# EAGLE board PCB Resistor Board (EAGLE 9.6.2)
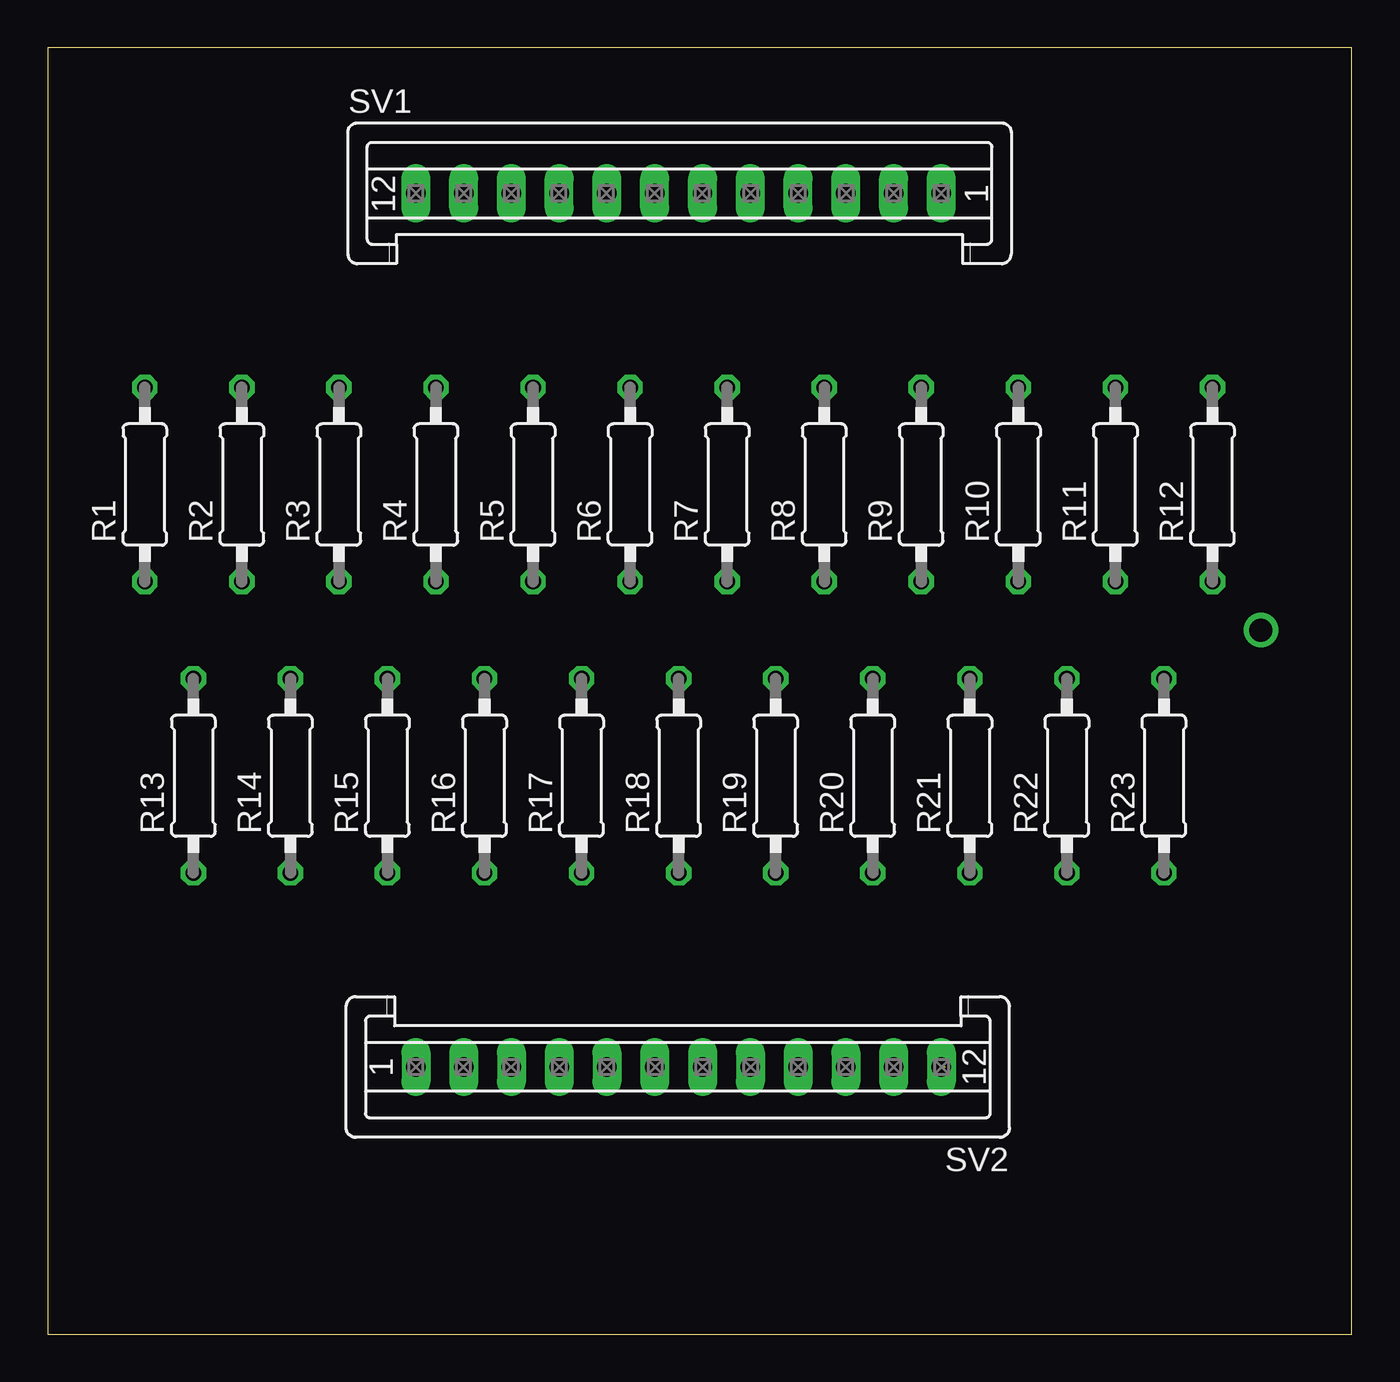
[diagram p0: board, top side]
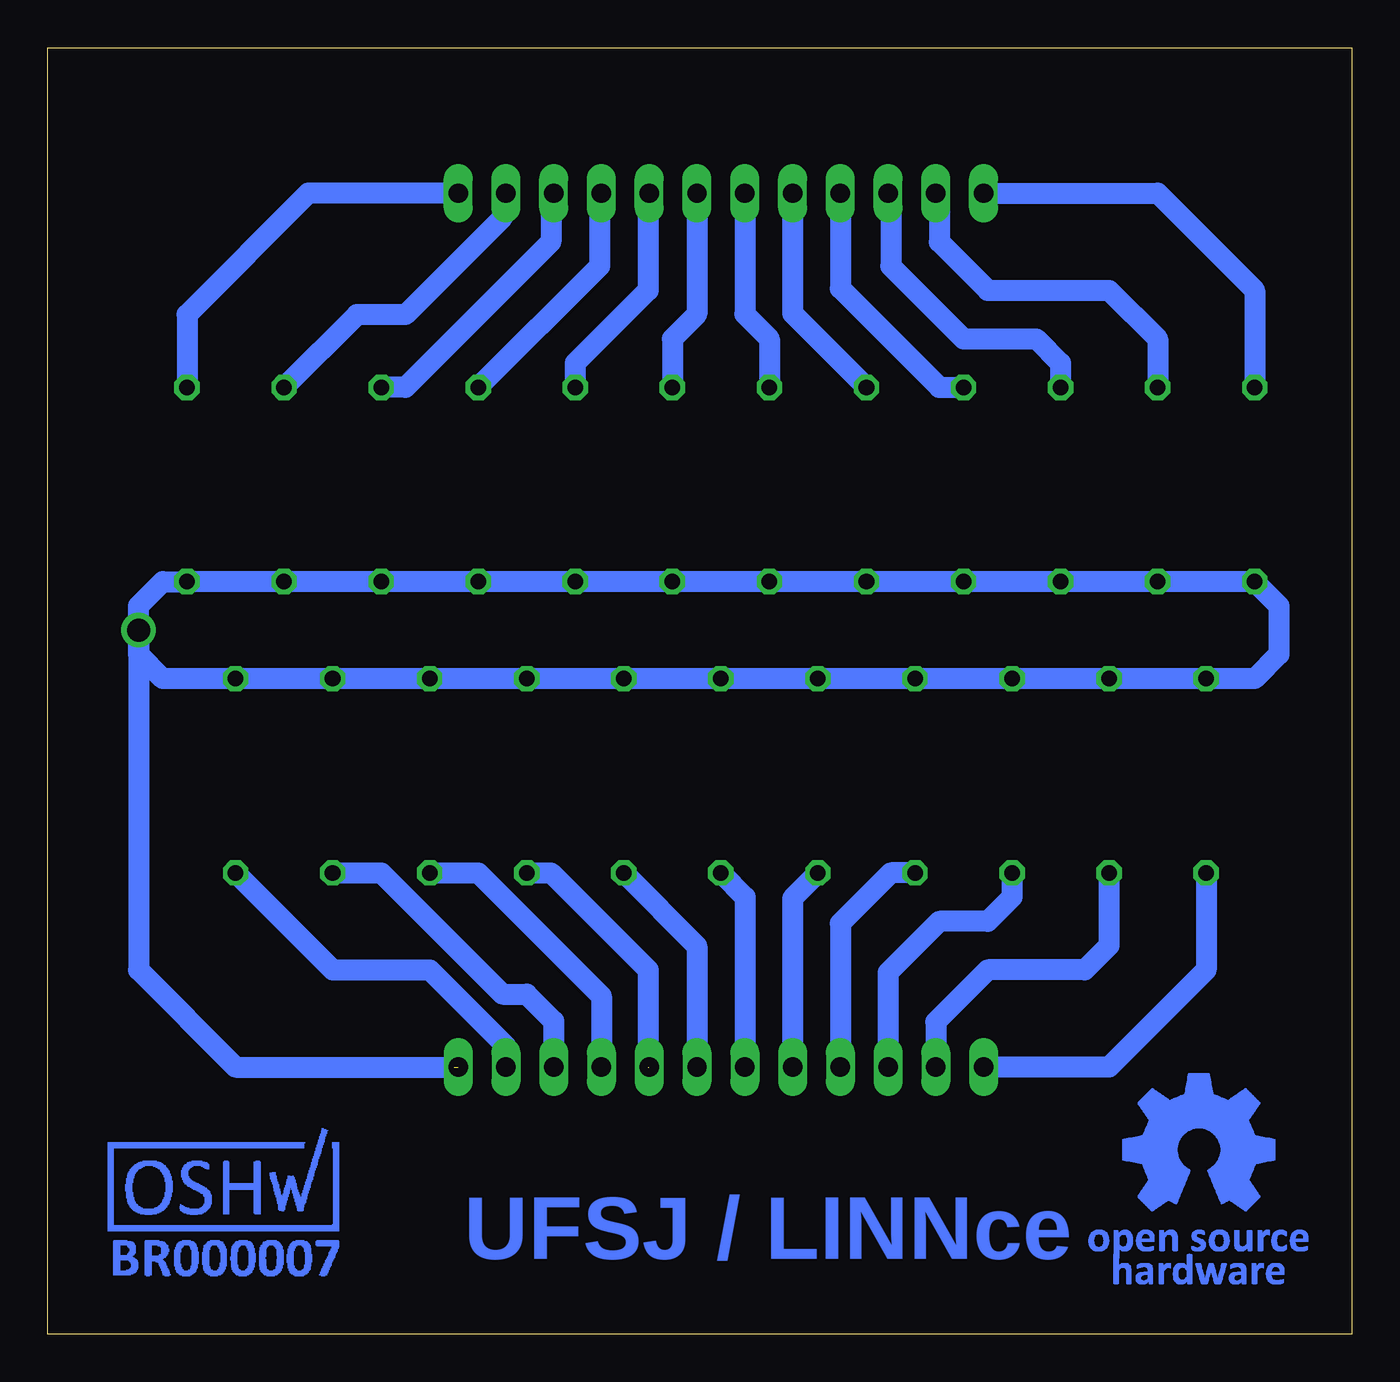
[diagram p1: board, bottom side, seen from below]

Size 68.25 x 67.3 mm. Coordinates in mm from the lower left corner, seen from the top.
Outline: 0,0 68.25,0 68.25,67.3 0,67.3 0,0
Copper layers (1*16): Top 0.035mm / dielectric 1.5mm / Bottom 0.035mm
Design rules "default": minimum track width 6mil, minimum drill 0.35mm, track to track 6mil, track to pad 6mil, pad to pad 6mil, via to via 6mil, smd to smd 6mil, copper to edge 40mil, drill to drill 6mil, minimum pad ring 10mil, minimum via ring 8mil, stop-mask expansion 4mil, vias tented up to drill 0mil, thermal gap 10mil

## Footprints (pad centres in the part's own frame; a part is rotated, then mirrored left to right if it is on the bottom)
0207/10 = drill 0.813 octagon: 1 -5.08,0; 2 5.08,0
S12P = drill 1.016 long: 1 13.75,0; 2 11.25,0; 3 8.75,0; 4 6.25,0; 5 3.75,0; 6 1.25,0; 7 -1.25,0; 8 -3.75,0; 9 -6.25,0; 10 -8.75,0; 11 -11.25,0; 12 -13.75,0

## Placement (x,y rotation side)
R1  [0207/10]  5.08,44.45 90 top
R2  [0207/10]  10.16,44.45 90 top
R3  [0207/10]  15.24,44.45 90 top
R4  [0207/10]  20.32,44.45 90 top
R5  [0207/10]  25.4,44.45 90 top
R6  [0207/10]  30.48,44.45 90 top
R7  [0207/10]  35.56,44.45 90 top
R8  [0207/10]  40.64,44.45 90 top
R9  [0207/10]  45.72,44.45 90 top
R10  [0207/10]  50.8,44.45 90 top
R11  [0207/10]  55.88,44.45 90 top
R12  [0207/10]  60.96,44.45 90 top
R13  [0207/10]  7.62,29.21 90 top
R14  [0207/10]  12.7,29.21 90 top
R15  [0207/10]  17.78,29.21 90 top
R16  [0207/10]  22.86,29.21 90 top
R17  [0207/10]  27.94,29.21 90 top
R18  [0207/10]  33.02,29.21 90 top
R19  [0207/10]  38.1,29.21 90 top
R20  [0207/10]  43.18,29.21 90 top
R21  [0207/10]  48.26,29.21 90 top
R22  [0207/10]  53.34,29.21 90 top
R23  [0207/10]  58.42,29.21 90 top
SV1  [S12P]  33.02,59.69 0 top
SV2  [S12P]  33.02,13.97 180 top

## Library data of the parts
R1-R23 = rcl; SPICEPREFIX: R
SV1 SV2 = con-amp-mt; OC_FARNELL: unknown; OC_NEWARK: unknown

## Nets
N$1: R13.1 SV2.1
N$2: R14.1 SV2.2
N$3: R15.1 SV2.3
N$4: R16.1 SV2.4
N$5: R17.1 SV2.5
N$6: R18.1 SV2.6
N$7: R19.1 SV2.7
N$8: R20.1 SV2.8
N$9: R21.1 SV2.9
N$10: R22.1 SV2.10
N$11: R23.1 SV2.11
N$12: R1.2 SV1.12
N$13: R1.1 R2.1 R3.1 R4.1 R5.1 R6.1 R7.1 R8.1 R9.1 R10.1 R11.1 R12.1 R13.2 R14.2 R15.2 R16.2 R17.2 R18.2 R19.2 R20.2 R21.2 R22.2 R23.2 SV2.12
N$14: R2.2 SV1.11
N$15: R3.2 SV1.10
N$16: R4.2 SV1.9
N$17: R5.2 SV1.8
N$18: R6.2 SV1.7
N$19: R7.2 SV1.6
N$20: R8.2 SV1.5
N$21: R9.2 SV1.4
N$22: R10.2 SV1.3
N$23: R11.2 SV1.2
N$24: R12.2 SV1.1

## Tracks (layer width: path | path; a pad name or v marks a point on that pad's centre or on a via)
N$1
  Bottom 1.1: R13.1 7.62,19.05 12.7,13.97 SV2.1
N$2
  Bottom 1.1: R14.1 12.7,20.32 13.97,19.05 19.05,19.05 21.77,16.33 SV2.2
N$3
  Bottom 1.1: R15.1 17.78,22.86 19.05,21.59 21.59,21.59 24.27,18.91 SV2.3
N$4
  Bottom 1.1: R16.1 24.13,24.13 26.77,21.49 SV2.4
N$5
  Bottom 1.1: R17.1 29.27,22.8 SV2.5
N$6
  Bottom 1.1: R18.1 31.75,22.86 31.75,20.32 31.75,13.99 SV2.6
N$7
  Bottom 1.1: SV2.7 34.27,20.3 R19.1
N$8  (1 unrouted)
  Bottom 1.1: R20.1 41.91,24.13 36.83,19.05 36.83,13.97
N$9
  Bottom 1.1: SV2.9 39.27,17.68 45.72,24.13 R21.1
N$10
  Bottom 1.1: 41.91,14.11 SV2.10 41.77,16.37 43.18,17.78 44.45,17.78 50.8,24.13 R22.1
N$11
  Bottom 1.1: R23.1 53.34,19.05 48.26,19.05 44.27,15.06 SV2.11
N$12
  Bottom 1.1: SV1.12 10.16,59.69 5.08,54.61 R1.2
N$13  (via drill 1.2)  (1 unrouted)
  Bottom 1.1: v63.5,36.83 63.5,35.56 62.23,34.29 R23.2 R22.2 R21.2 R20.2 R19.2 R18.2 R17.2 R16.2 R15.2 R14.2 R13.2 5.08,34.29 3.81,35.56 3.81,38.1 R1.1 R2.1 R3.1 R4.1 R5.1 R6.1 R7.1 R8.1 R9.1 R10.1 R11.1 R12.1 62.23,39.37 63.5,38.1 v63.5,36.83 | v63.5,36.83 63.5,19.05 58.42,13.97 46.99,13.97
N$14
  Bottom 1.1: SV1.11 21.59,59.51 21.59,57.15 19.05,54.61 12.7,54.61 10.16,52.07 R2.2
N$15
  Bottom 1.1: SV1.10 24.13,59.55 24.13,55.88 20.32,52.07 16.51,52.07 15.24,50.8 R3.2
N$16
  Bottom 1.1: SV1.9 26.77,54.71 21.59,49.53 R4.2
N$17
  Bottom 1.1: SV1.8 29.27,53.4 R5.2
N$18
  Bottom 1.1: SV1.7 31.77,53.36 30.48,52.07 R6.2
N$19
  Bottom 1.1: SV1.6 34.27,53.36 35.56,52.07 R7.2
N$20
  Bottom 1.1: SV1.5 36.83,59.63 36.83,54.61 40.64,50.8 R8.2
N$21
  Bottom 1.1: SV1.4 39.37,59.59 39.37,55.88 R9.2
N$22
  Bottom 1.1: SV1.3 41.91,59.55 41.91,57.15 49.53,49.53 R10.2
N$23
  Bottom 1.1: SV1.2 44.45,59.51 44.45,58.42 49.53,53.34 52.07,53.34 R11.2
N$24
  Bottom 1.1: SV1.1 54.61,59.69 60.96,53.34 R12.2
(copper drawn outside any net)
  shapes: Bottom area x3338

## Text on the board
Bottom: UFSJ / LINNce